# EAGLE board oresat-c3-v2 (EAGLE 9.5.2), part 1 of 2
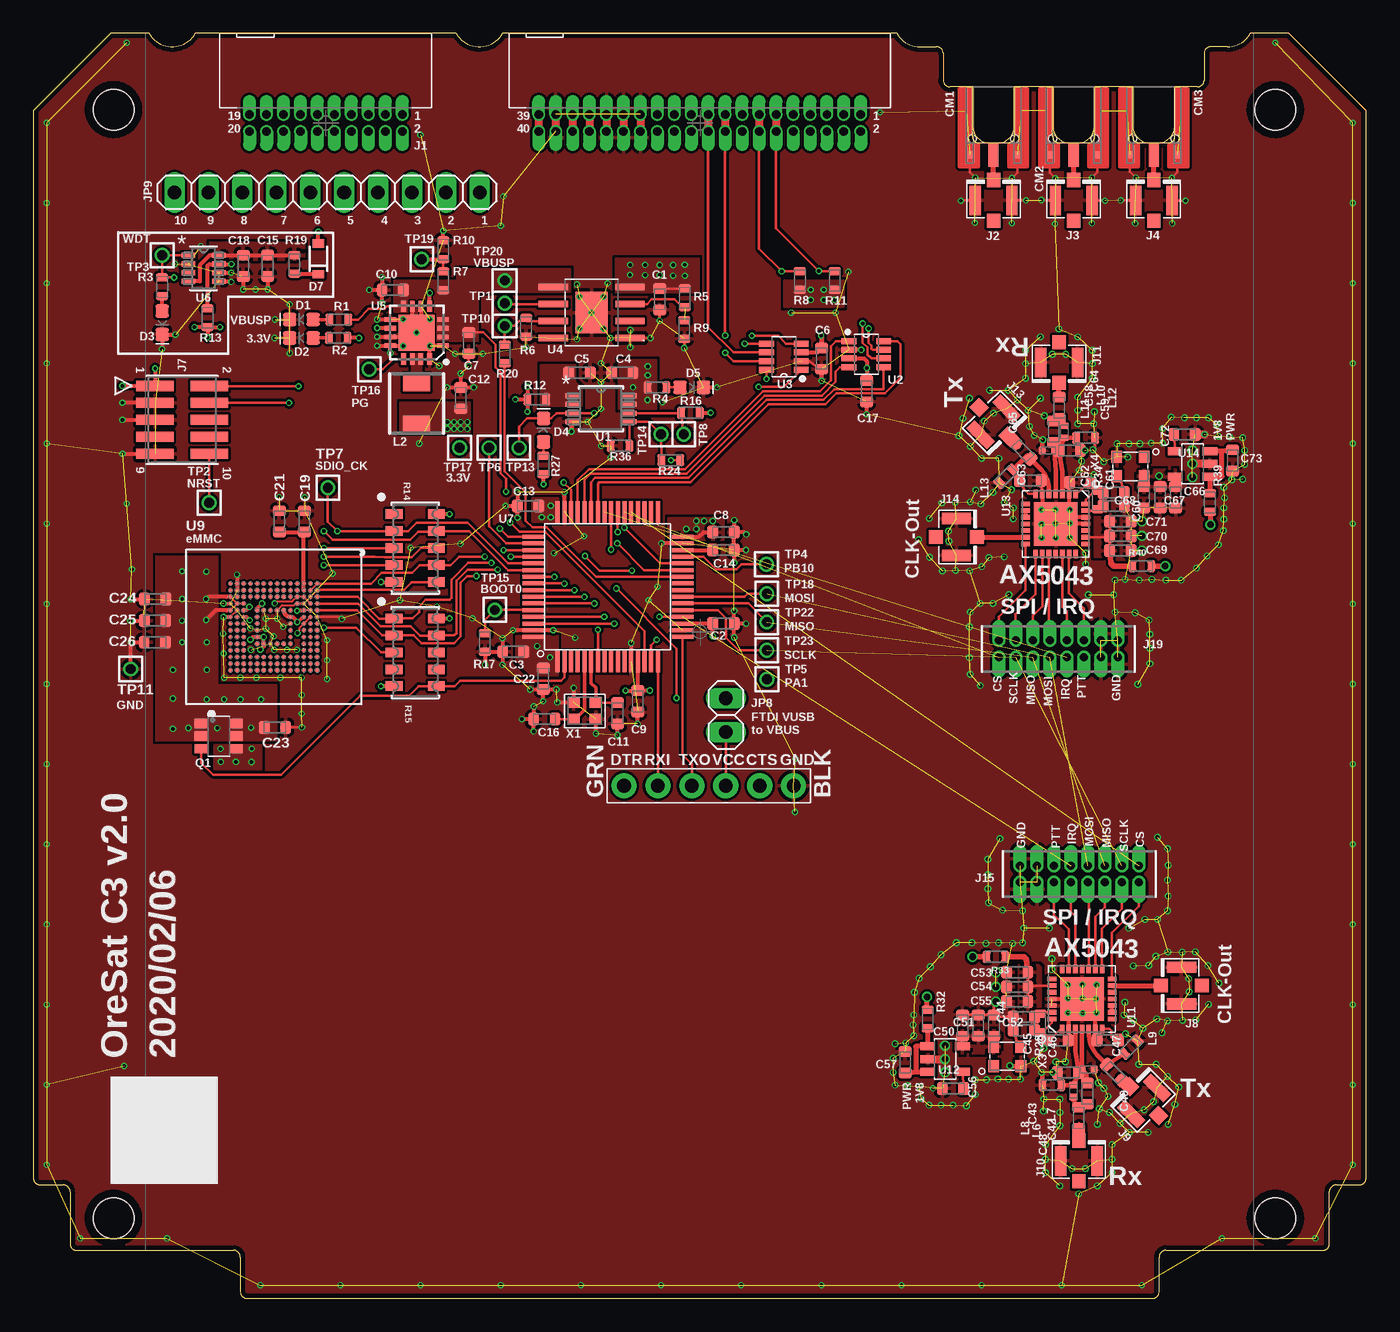
[diagram p0: board, top side]
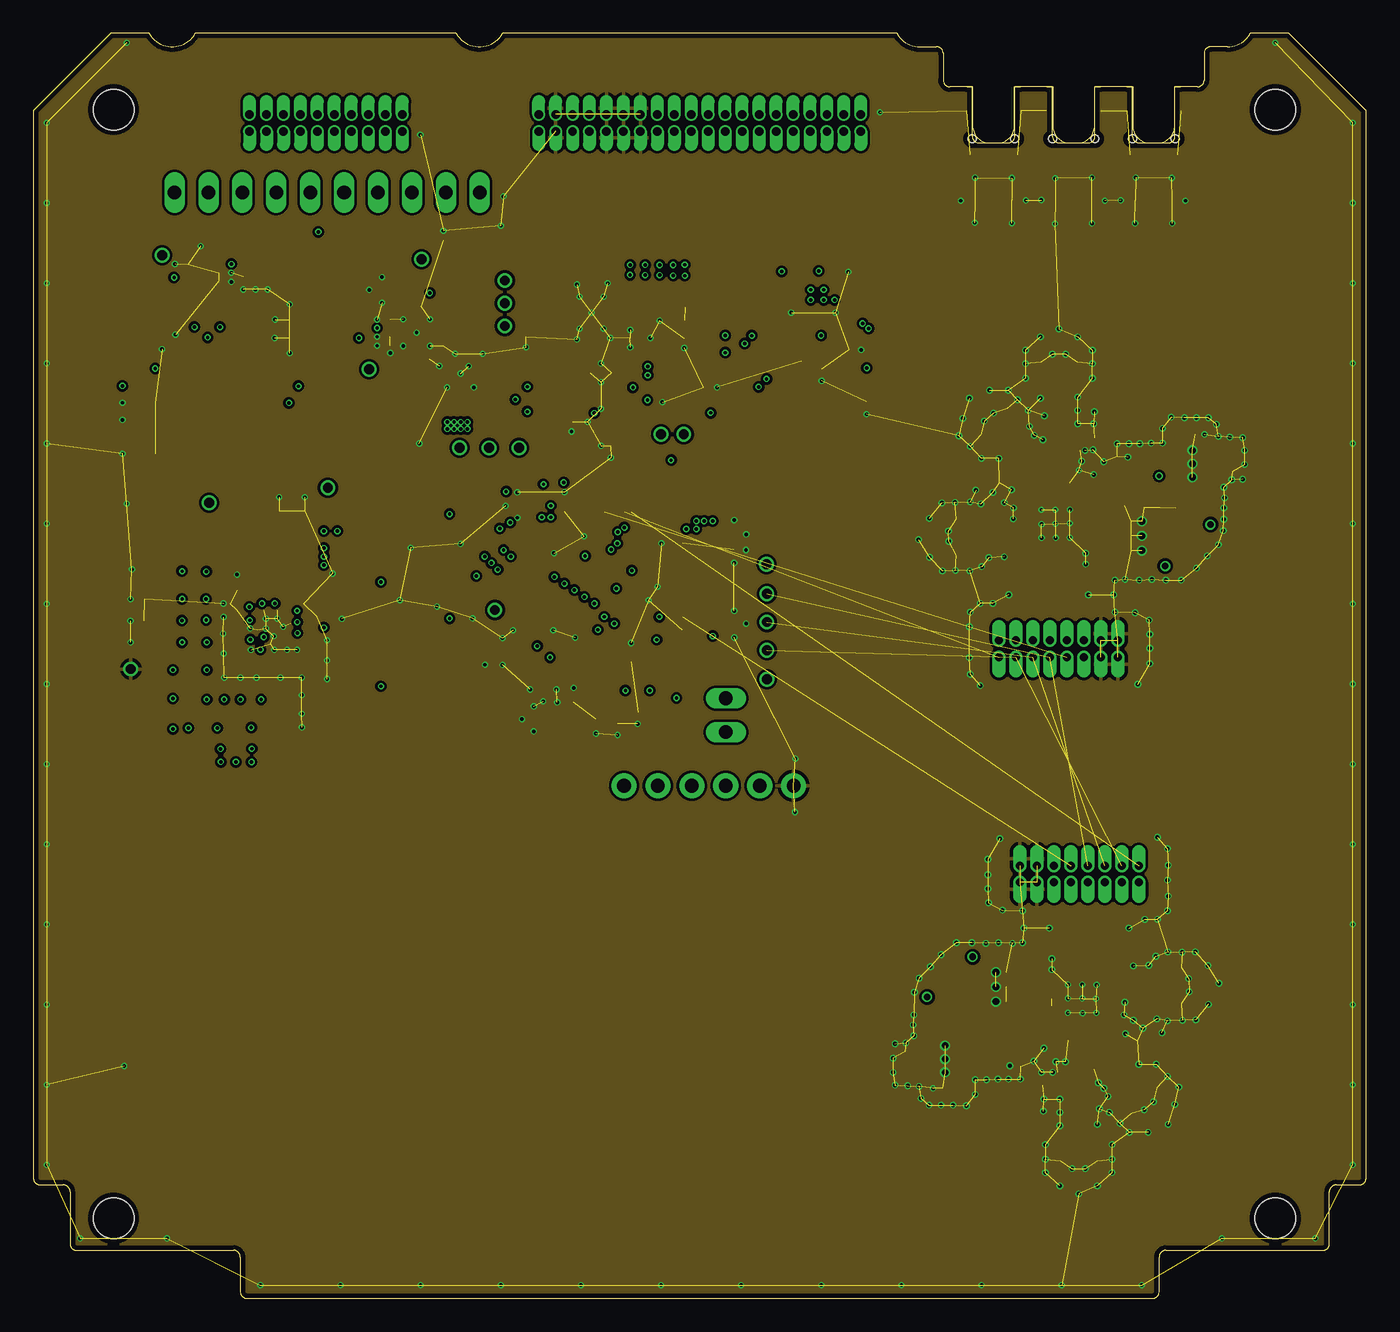
[diagram p1: board, inner layer Route2]
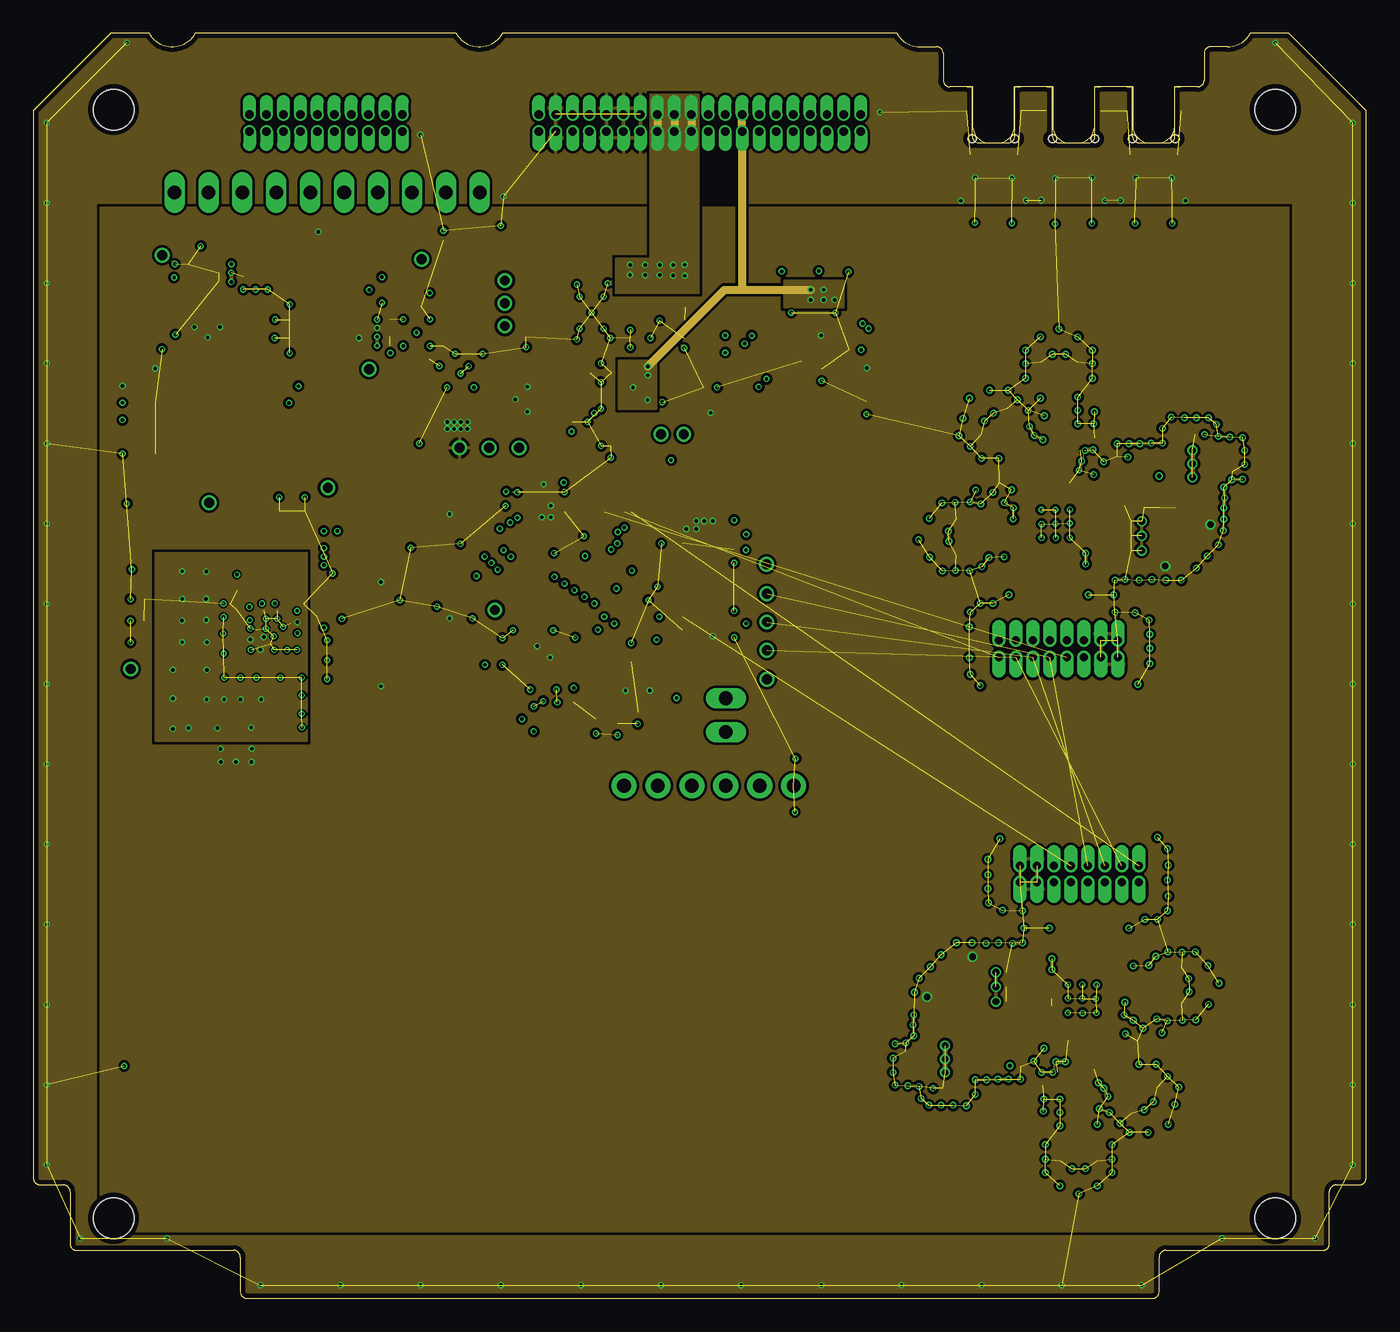
[diagram p2: board, inner layer route]
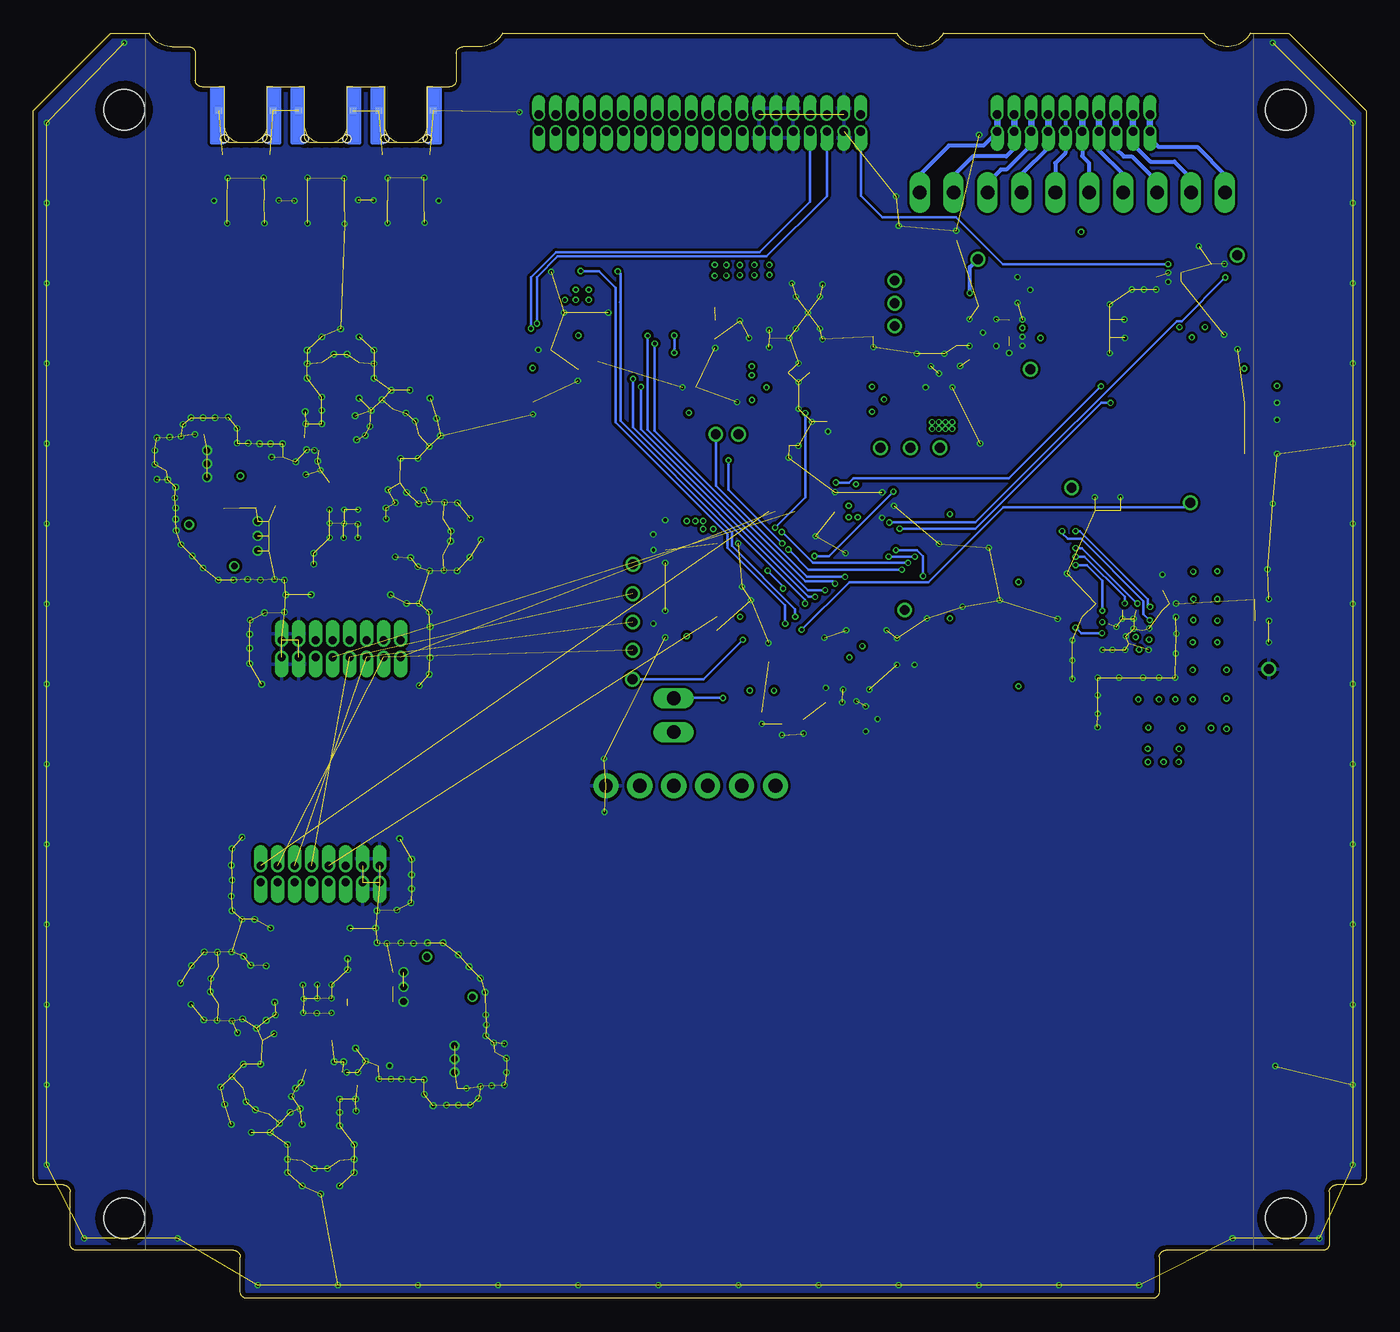
[diagram p3: board, bottom side, seen from below]

Size 99.8 x 94.7 mm. Coordinates in mm from the lower left corner, seen from the top.
Copper layers (1*2*15*16): Top 0.035559375mm / dielectric 0.17018125mm / Route2 0.01778125mm / dielectric 47mil / route 0.01778125mm / dielectric 0.17018125mm / Bottom 0.035559375mm
Design rules "oshpark-4layer *": minimum track width 5mil, minimum drill 10mil, track to track 5mil, track to pad 5mil, pad to pad 5mil, via to via 5mil, smd to smd 5mil, copper to edge 15mil, drill to drill 6mil, minimum pad ring 4mil, minimum via ring 4mil, stop-mask expansion 2.5mil, vias tented up to drill 10mil, thermal gap 10mil
Net classes: 1 RF1: clearance 0.8 mm; 2 RF2: clearance 0.4 mm

## Footprints (pad centres in the part's own frame; a part is rotated, then mirrored left to right if it is on the bottom)
.0603-B-NOSILK = smd 0.8 x 0.95: 1 -0.8,0; 2 0.8,0
J-MOLEX-SMPM-073300-003X = smd 0.508 x 0.508: P$1 -1.778,-5.08; P$2 1.778,-5.08 | smd 0.508 x 0.508 bottom: P$3 -2.032,-1.778; P$4 2.032,-1.778 | smd 0.762 x 1.778: RF 0,-5.08 | hole 0.61: 1.587,-3.886; -1.587,-3.886
LED-0603 = smd 1 x 1: A -0.877,0; C 0.877,0
SOD-323 = smd 0.63 x 0.83: 1 -1.15,0; 2 1.15,0
STAND-OFF-TIGHT = hole 3.048: 0,0
J-SAMTEC-TFM-110-X1-XXX-D-RA = drill 0.635 pad 0.965 offset: 1 5.715,0.635; 2 5.715,-0.635; 3 4.445,0.635; 4 4.445,-0.635; 5 3.175,0.635; 6 3.175,-0.635; 7 1.905,0.635; 8 1.905,-0.635; 9 0.635,0.635; 10 0.635,-0.635; 11 -0.635,0.635; 12 -0.635,-0.635; 13 -1.905,0.635; 14 -1.905,-0.635; 15 -3.175,0.635; 16 -3.175,-0.635; 17 -4.445,0.635; 18 -4.445,-0.635; 19 -5.715,0.635; 20 -5.715,-0.635
U.FL = smd 2.2 x 0.85: 1 0,1.375; 2 0,-1.375 | smd 1.05 x 1: FEED 1.525,0; NC -1.525,0
J-SAMTEC-TFM-120-X1-XXX-D-RA = drill 0.635 pad 0.965 offset: 1 12.065,0.635; 2 12.065,-0.635; 3 10.795,0.635; 4 10.795,-0.635; 5 9.525,0.635; 6 9.525,-0.635; 7 8.255,0.635; 8 8.255,-0.635; 9 6.985,0.635; 10 6.985,-0.635; 11 5.715,0.635; 12 5.715,-0.635; 13 4.445,0.635; 14 4.445,-0.635; 15 3.175,0.635; 16 3.175,-0.635; 17 1.905,0.635; 18 1.905,-0.635; 19 0.635,0.635; 20 0.635,-0.635; 21 -0.635,0.635; 22 -0.635,-0.635; 23 -1.905,0.635; 24 -1.905,-0.635; 25 -3.175,0.635; 26 -3.175,-0.635; 27 -4.445,0.635; 28 -4.445,-0.635; 29 -5.715,0.635; 30 -5.715,-0.635; 31 -6.985,0.635; 32 -6.985,-0.635; 33 -8.255,0.635; 34 -8.255,-0.635; 35 -9.525,0.635; 36 -9.525,-0.635; 37 -10.795,0.635; 38 -10.795,-0.635; 39 -12.065,0.635; 40 -12.065,-0.635
CON10_2X5_DUK_FTSH = smd 0.762 x 2.794: 1 -2.54,-2.032; 2 -2.54,2.032; 3 -1.27,-2.032; 4 -1.27,2.032; 5 0,-2.032; 6 0,2.032; 7 1.27,-2.032; 8 1.27,2.032; 9 2.54,-2.032; 10 2.54,2.032
2X8X1.27 = drill 0.6 pad 1.016 offset: 1 -4.445,0.635; 2 -4.445,-0.635; 3 -3.175,0.635; 4 -3.175,-0.635; 5 -1.905,0.635; 6 -1.905,-0.635; 7 -0.635,0.635; 8 -0.635,-0.635; 9 0.635,0.635; 10 0.635,-0.635; 11 1.905,0.635; 12 1.905,-0.635; 13 3.175,0.635; 14 3.175,-0.635; 15 4.445,0.635; 16 4.445,-0.635
1X02 = drill 1.016 long: 1 -1.27,0; 2 1.27,0
1X10 = drill 1.016 long: 1 -11.43,0; 2 -8.89,0; 3 -6.35,0; 4 -3.81,0; 5 -1.27,0; 6 1.27,0; 7 3.81,0; 8 6.35,0; 9 8.89,0; 10 11.43,0
ECS-MPI4040 = smd 2 x 1.3: 1 0,1.575; 2 0,-1.575
.0402-C-NOSILK = smd 0.5 x 0.6: 1 -0.45,0; 2 0.45,0
.0603-C-NOSILK = smd 0.6 x 0.9: 1 -0.7,0; 2 0.7,0
SOT23-6 = smd 0.7 x 1: 1 -0.95,-1.3; 2 0,-1.3; 3 0.95,-1.3; 4 0.95,1.3; 5 0,1.3; 6 -0.95,1.3
ARRAY_EXBA-M = smd 1.27 x 0.711: 1 -1.575,2.54; 2 -1.575,1.27; 3 -1.575,0; 4 -1.575,-1.27; 5 -1.575,-2.54; 6 1.575,-2.54; 7 1.575,-1.27; 8 1.575,0; 9 1.575,1.27; 10 1.575,2.54
2MM-TEST-POINT = drill 0.737: 1 0,0
21-0036K-L = smd 1.06 x 0.376: 1 -2.134,0.975; 2 -2.134,0.325; 3 -2.134,-0.325; 4 -2.134,-0.975; 5 2.134,-0.975; 6 2.134,-0.325; 7 2.134,0.325; 8 2.134,0.975
SOT23-8_TI-DCN = smd 0.45 x 1.1: 1 -0.975,-1.3; 2 -0.325,-1.3; 3 0.325,-1.3; 4 0.975,-1.3; 5 0.975,1.3; 6 0.325,1.3; 7 -0.325,1.3; 8 -0.975,1.3
SO-POWERPAD-8 = smd 0.5 x 2.2: 1 -1.905,-2.875; 2 -0.635,-2.875; 3 0.635,-2.875; 4 1.905,-2.875; 5 1.905,2.875; 6 0.635,2.875; 7 -0.635,2.875; 8 -1.905,2.875 | smd 3.1 x 2.4: THERMAL 0,0
S-PVQFN-16 = smd 0.85 x 0.35: 1 -1.975,0.975; 2 -1.975,0.325; 3 -1.975,-0.325; 4 -1.975,-0.975; 9 1.975,-0.975; 10 1.975,-0.325; 11 1.975,0.325; 12 1.975,0.975 | smd 0.35 x 0.85: 5 -0.975,-1.975; 6 -0.325,-1.975; 7 0.325,-1.975; 8 0.975,-1.975; 13 0.975,1.975; 14 0.325,1.975; 15 -0.325,1.975; 16 -0.975,1.975 | smd 2.7 x 2.7: PAD 0,0
21-0078H-L = smd 1.016 x 0.381: 1 -1.143,0.975; 2 -1.143,0.325; 3 -1.143,-0.325; 4 -1.143,-0.975; 5 1.143,-0.975; 6 1.143,-0.325; 7 1.143,0.325; 8 1.143,0.975
QFP-10X10-64 = smd 1.6 x 0.3: 1 -5.6,3.75; 2 -5.6,3.25; 3 -5.6,2.75; 4 -5.6,2.25; 5 -5.6,1.75; 6 -5.6,1.25; 7 -5.6,0.75; 8 -5.6,0.25; 9 -5.6,-0.25; 10 -5.6,-0.75; 11 -5.6,-1.25; 12 -5.6,-1.75; 13 -5.6,-2.25; 14 -5.6,-2.75; 15 -5.6,-3.25; 16 -5.6,-3.75; 33 5.6,-3.75; 34 5.6,-3.25; 35 5.6,-2.75; 36 5.6,-2.25; 37 5.6,-1.75; 38 5.6,-1.25; 39 5.6,-0.75; 40 5.6,-0.25; 41 5.6,0.25; 42 5.6,0.75; 43 5.6,1.25; 44 5.6,1.75; 45 5.6,2.25; 46 5.6,2.75; 47 5.6,3.25; 48 5.6,3.75 | smd 0.3 x 1.6: 17 -3.75,-5.6; 18 -3.25,-5.6; 19 -2.75,-5.6; 20 -2.25,-5.6; 21 -1.75,-5.6; 22 -1.25,-5.6; 23 -0.75,-5.6; 24 -0.25,-5.6; 25 0.25,-5.6; 26 0.75,-5.6; 27 1.25,-5.6; 28 1.75,-5.6; 29 2.25,-5.6; 30 2.75,-5.6; 31 3.25,-5.6; 32 3.75,-5.6; 49 3.75,5.6; 50 3.25,5.6; 51 2.75,5.6; 52 2.25,5.6; 53 1.75,5.6; 54 1.25,5.6; 55 0.75,5.6; 56 0.25,5.6; 57 -0.25,5.6; 58 -0.75,5.6; 59 -1.25,5.6; 60 -1.75,5.6; 61 -2.25,5.6; 62 -2.75,5.6; 63 -3.25,5.6; 64 -3.75,5.6
BGA-153(11.5X13)(EMMC-BA) = smd 0.28 x 0.28: A1 -3.25,3.25; A2 -2.75,3.25; A3 -2.25,3.25; A4 -1.75,3.25; A5 -1.25,3.25; A6 -0.75,3.25; A7 -0.25,3.25; A8 0.25,3.25; A9 0.75,3.25; A10 1.25,3.25; A11 1.75,3.25; A12 2.25,3.25; A13 2.75,3.25; A14 3.25,3.25; B1 -3.25,2.75; B2 -2.75,2.75; B3 -2.25,2.75; B4 -1.75,2.75; B5 -1.25,2.75; B6 -0.75,2.75; B7 -0.25,2.75; B8 0.25,2.75; B9 0.75,2.75; B10 1.25,2.75; B11 1.75,2.75; B12 2.25,2.75; B13 2.75,2.75; B14 3.25,2.75; C1 -3.25,2.25; C2 -2.75,2.25; C3 -2.25,2.25; C4 -1.75,2.25; C5 -1.25,2.25; C6 -0.75,2.25; C7 -0.25,2.25; C8 0.25,2.25; C9 0.75,2.25; C10 1.25,2.25; C11 1.75,2.25; C12 2.25,2.25; C13 2.75,2.25; C14 3.25,2.25; D1 -3.25,1.75; D2 -2.75,1.75; D3 -2.25,1.75; D4 -1.75,1.75; D12 2.25,1.75; D13 2.75,1.75; D14 3.25,1.75; E1 -3.25,1.25; E2 -2.75,1.25; E3 -2.25,1.25; E5 -1.25,1.25; E6 -0.75,1.25; E7 -0.25,1.25; E8 0.25,1.25; E9 0.75,1.25; E10 1.25,1.25; E12 2.25,1.25; E13 2.75,1.25; E14 3.25,1.25; F1 -3.25,0.75; F2 -2.75,0.75; F3 -2.25,0.75; F5 -1.25,0.75; F10 1.25,0.75; F12 2.25,0.75; F13 2.75,0.75; F14 3.25,0.75; G1 -3.25,0.25; G2 -2.75,0.25; G3 -2.25,0.25; G5 -1.25,0.25; G10 1.25,0.25; G12 2.25,0.25; G13 2.75,0.25; G14 3.25,0.25; H1 -3.25,-0.25; H2 -2.75,-0.25; H3 -2.25,-0.25; H5 -1.25,-0.25; H10 1.25,-0.25; H12 2.25,-0.25; H13 2.75,-0.25; H14 3.25,-0.25; J1 -3.25,-0.75; J2 -2.75,-0.75; J3 -2.25,-0.75; J5 -1.25,-0.75; J10 1.25,-0.75; J12 2.25,-0.75; J13 2.75,-0.75; J14 3.25,-0.75; K1 -3.25,-1.25; K2 -2.75,-1.25; K3 -2.25,-1.25; K5 -1.25,-1.25; K6 -0.75,-1.25; K7 -0.25,-1.25; K8 0.25,-1.25; K9 0.75,-1.25; K10 1.25,-1.25; K12 2.25,-1.25; K13 2.75,-1.25; K14 3.25,-1.25; L1 -3.25,-1.75; L2 -2.75,-1.75; L3 -2.25,-1.75; L12 2.25,-1.75; L13 2.75,-1.75; L14 3.25,-1.75; M1 -3.25,-2.25; M2 -2.75,-2.25; M3 -2.25,-2.25; M4 -1.75,-2.25; M5 -1.25,-2.25; M6 -0.75,-2.25; M7 -0.25,-2.25; M8 0.25,-2.25; M9 0.75,-2.25; M10 1.25,-2.25; M11 1.75,-2.25; M12 2.25,-2.25; M13 2.75,-2.25; M14 3.25,-2.25; N1 -3.25,-2.75; N2 -2.75,-2.75; N3 -2.25,-2.75; N4 -1.75,-2.75; N5 -1.25,-2.75; N6 -0.75,-2.75; N7 -0.25,-2.75; N8 0.25,-2.75; N9 0.75,-2.75; N10 1.25,-2.75; N11 1.75,-2.75; N12 2.25,-2.75; N13 2.75,-2.75; N14 3.25,-2.75; P1 -3.25,-3.25; P2 -2.75,-3.25; P3 -2.25,-3.25; P4 -1.75,-3.25; P5 -1.25,-3.25; P6 -0.75,-3.25; P7 -0.25,-3.25; P8 0.25,-3.25; P9 0.75,-3.25; P10 1.25,-3.25; P11 1.75,-3.25; P12 2.25,-3.25; P13 2.75,-3.25; P14 3.25,-3.25
QFN28-5X5-WITH-CENTER-PAD = smd 0.65 x 0.35: 1 -2.25,1.5; 2 -2.25,1; 3 -2.25,0.5; 4 -2.25,0; 5 -2.25,-0.5; 6 -2.25,-1; 7 -2.25,-1.5; 15 2.25,-1.5; 16 2.25,-1; 17 2.25,-0.5; 18 2.25,0; 19 2.25,0.5; 20 2.25,1; 21 2.25,1.5 | smd 0.35 x 0.65: 8 -1.5,-2.25; 9 -1,-2.25; 10 -0.5,-2.25; 11 0,-2.25; 12 0.5,-2.25; 13 1,-2.25; 14 1.5,-2.25; 22 1.5,2.25; 23 1,2.25; 24 0.5,2.25; 25 0,2.25; 26 -0.5,2.25; 27 -1,2.25; 28 -1.5,2.25 | smd 3.25 x 3.25: PAD 0,0
SOT-23 = smd 1.1 x 0.6: 1 -1.3,0.95; 2 -1.3,0; 3 -1.3,-0.95; 4 1.3,-0.95; 5 1.3,0.95
6_PIN_SERIAL_TARGET_SIDE_W_SILK = drill 1.016 pad 1.88: P$1 -6.35,0; P$2 -3.81,0; P$3 -1.27,0; P$4 1.27,0; P$5 3.81,0; P$6 6.35,0
CRYSTAL_2.5X2 = smd 0.9 x 0.8: 1 -0.825,-0.625; 2 0.825,-0.625; 3 0.825,0.625; 4 -0.825,0.625
2.5X2.0 = smd 0.8 x 0.9: 1 -1.025,-0.725; 2 1.025,-0.725; 3 1.025,0.725; 4 -1.025,0.725

## Placement (x,y rotation side)
C1  1uF  [.0603-B-NOSILK]  46.9,74.8 270 top
C2  0.1uf  [.0603-B-NOSILK]  51.68,50.52 180 top
C3  0.1uf  [.0603-B-NOSILK]  35.93,48.41 0 top
C4  1uF  [.0603-B-NOSILK]  44.1,69.3 180 top
C5  1uF  [.0603-B-NOSILK]  40.9,69.3 0 top
C6  0.1uf  [.0603-B-NOSILK]  59.03,70.36 90 top
C7  10uF  [.0603-B-NOSILK]  32.6,71.52 270 top
C8  0.1uf  [.0603-B-NOSILK]  51.68,57.37 180 top
C9  0.1uf  [.0603-B-NOSILK]  45.26,44.7 90 top
C10  10uF  [.0603-B-NOSILK]  26.91,75.49 180 top
C11  20pF  [.0603-B-NOSILK]  43.74,43.81 270 top
C12  22pF  [.0603-B-NOSILK]  32,67.4 90 top
C13  0.1uf  [.0603-B-NOSILK]  37.04,59.33 0 top
C14  2.2uF  [.0603-B-NOSILK]  51.68,56.03 0 top
C15  0.1uf  [.0603-B-NOSILK]  17.54,77.3 270 top
C16  20pF  [.0603-B-NOSILK]  38.26,43.37 180 top
C17  0.1uf  [.0603-B-NOSILK]  62.4,67.91 90 top
C18  47uF  [.0603-B-NOSILK]  15.72,77.29 270 top
C19  2.2uF  [.0603-B-NOSILK]  20.3,58.17 90 top
C21  0.1uf  [.0603-B-NOSILK]  18.42,58.17 90 top
C22  0.1uf  [.0603-B-NOSILK]  38.19,46.39 90 top
C23  1uF  [.0603-B-NOSILK]  18.09,42.75 0 top
C24  1uF  [.0603-B-NOSILK]  9.12,52.36 180 top
C25  1uF  [.0603-B-NOSILK]  9.11,50.74 180 top
C26  10uF  [.0603-B-NOSILK]  9.1,49.12 180 top
C42  8.2pF  [.0603-B-NOSILK]  78.92,15.34 90 top
C43  8.2pF  [.0603-B-NOSILK]  77.47,16.93 0 top
C44  1000pF  [.0603-B-NOSILK]  74.17,21.07 180 top
C45  1000pF  [.0603-B-NOSILK]  74.17,20.07 180 top
C46  82pF  [.0603-B-NOSILK]  76.67,19.32 0 top
C47  82pF  [.0603-B-NOSILK]  80.45,19.36 0 top
C48  22pF  [.0603-B-NOSILK]  78.27,13.52 90 top
C49  22pF  [.0603-B-NOSILK]  80.94,16.91 135 top
C50  0.022uF  [.0603-B-NOSILK]  69.58,20.43 90 top
C51  0.022uF  [.0603-B-NOSILK]  70.75,20.43 90 top
C52  4.7uF  [.0603-B-NOSILK]  71.92,20.43 90 top
C53  0.022uF  [.0603-B-NOSILK]  73.67,24.43 180 top
C54  0.022uF  [.0603-B-NOSILK]  73.67,23.32 180 top
C55  4.7uF  [.0603-B-NOSILK]  73.67,22.23 180 top
C56  10n  [.0603-B-NOSILK]  68.88,15.72 180 top
C57  1uF  [.0603-B-NOSILK]  65.28,17.68 90 top
C58  8.2pF  [.0603-B-NOSILK]  76.4,64.88 270 top
C59  8.2pF  [.0603-B-NOSILK]  77.6,63.48 180 top
C60  1000pF  [.0603-B-NOSILK]  80.9,59.33 0 top
C61  1000pF  [.0603-B-NOSILK]  80.9,60.33 0 top
C62  82pF  [.0603-B-NOSILK]  78.4,61.08 180 top
C63  82pF  [.0603-B-NOSILK]  74.65,61.23 180 top
C64  22pF  [.0603-B-NOSILK]  76.8,66.68 270 top
C65  22pF  [.0603-B-NOSILK]  74.1,63.44 315 top
C66  0.022uF  [.0603-B-NOSILK]  85.54,59.97 270 top
C67  0.1uf  [.0603-B-NOSILK]  84.36,59.98 270 top
C68  4.7uF  [.0603-B-NOSILK]  83.15,59.98 270 top
C69  0.022uF  [.0603-B-NOSILK]  81.4,55.98 0 top
C70  0.1uf  [.0603-B-NOSILK]  81.4,57.08 0 top
C71  4.7uF  [.0603-B-NOSILK]  81.4,58.18 0 top
C72  10n  [.0603-B-NOSILK]  86.2,64.68 0 top
C73  1uF  [.0603-B-NOSILK]  89.8,62.73 270 top
CM1  J-MOLEX-SMPM-73300-003X  [J-MOLEX-SMPM-073300-003X]  71.9,90.7 0 top
CM2  J-MOLEX-SMPM-73300-003X  [J-MOLEX-SMPM-073300-003X]  77.9,90.7 0 top
CM3  J-MOLEX-SMPM-73300-003X  [J-MOLEX-SMPM-073300-003X]  83.9,90.7 0 top
D1  GREEN  [LED-0603]  20.07,73.28 180 top
D2  GREEN  [LED-0603]  20.07,71.9 180 top
D3  GREEN  [LED-0603]  9.65,73.04 270 top
D4  GREEN  [LED-0603]  38.2,65 90 top
D5  GREEN  [LED-0603]  49.3,68.2 0 top
D7  1N4148  [SOD-323]  21.34,77.82 90 top
H1  STAND-OFFTIGHT  [STAND-OFF-TIGHT]  93,6 0 top
H2  STAND-OFFTIGHT  [STAND-OFF-TIGHT]  93,89 0 top
H3  STAND-OFFTIGHT  [STAND-OFF-TIGHT]  6,89 0 top
H4  STAND-OFFTIGHT  [STAND-OFF-TIGHT]  6,6 0 top
J1  J-SAMTEC-TFM-110-X1-XXX-D-RA  [J-SAMTEC-TFM-110-X1-XXX-D-RA]  21.9,87.99 0 top
J2  U.FL  [U.FL]  71.9,82.2 90 top
J3  U.FL  [U.FL]  77.9,82.2 90 top
J4  U.FL  [U.FL]  83.9,82.2 90 top
J6  J-SAMTEC-TFM-120-X1-XXX-D-RA  [J-SAMTEC-TFM-120-X1-XXX-D-RA]  49.9,87.99 0 top
J7  FTSH-105-XX-X-DV-K  [CON10_2X5_DUK_FTSH]  11.14,65.77 270 top
J8  U.FL  [U.FL]  85.97,23.42 180 top
J9  U.FL  [U.FL]  83.17,14.79 135 top
J10  U.FL  [U.FL]  78.29,10.3 90 top
J11  U.FL  [U.FL]  76.81,70.07 270 top
J13  U.FL  [U.FL]  71.91,65.63 315 top
J14  U.FL  [U.FL]  69.12,57 0 top
J15  HARWIN-2X8X1.27  [2X8X1.27]  78.33,31.77 180 top
J19  HARWIN-2X8X1.27  [2X8X1.27]  76.75,48.63 0 top
JP8  [1X02]  51.86,43.66 270 top
JP9  [1X10]  22,82.8 180 top
L2  6.8u  [ECS-MPI4040]  28.7,67 0 top
L6  43n  [.0402-C-NOSILK]  77.88,15.53 90 top
L7  43n  [.0402-C-NOSILK]  78.97,17.14 180 top
L8  91n  [.0603-C-NOSILK]  76.28,15.97 180 top
L9  91n  [.0603-C-NOSILK]  82.19,18.82 225 top
L10  43n  [.0402-C-NOSILK]  77.2,64.88 270 top
L11  43n  [.0402-C-NOSILK]  76,63.48 0 top
L12  91n  [.0603-C-NOSILK]  78.8,64.43 0 top
L13  91n  [.0603-C-NOSILK]  72.85,61.54 45 top
Q1  MOSFET-PCH-SOT23-6  [SOT23-6]  13.88,42.1 270 top
R1  2.7k  [.0603-C-NOSILK]  22.87,73.28 0 top
R2  2.7k  [.0603-C-NOSILK]  22.83,71.9 0 top
R3  2.7k  [.0603-C-NOSILK]  9.64,75.73 90 top
R4  2.7k  [.0603-C-NOSILK]  46.7,68.2 180 top
R5  31.6k  [.0603-C-NOSILK]  48.78,74.91 89.8 top
R6  3.1k  [.0603-C-NOSILK]  36.9,72.7 90 top
R7  10k  [.0603-C-NOSILK]  30.69,76.18 270 top
R8  4.7k  [.0603-C-NOSILK]  57.4,76.2 90 top
R9  10k  [.0603-C-NOSILK]  48.75,72.54 90 top
R10  NP  [.0603-C-NOSILK]  30.69,78.5 270 top
R11  4.7k  [.0603-C-NOSILK]  60,76.2 90 top
R12  0  [.0603-C-NOSILK]  37.7,67.3 180 top
R13  4.7k  [.0603-C-NOSILK]  13.05,73.41 90 top
R14  10k  [ARRAY_EXBA-M]  28.6,56.17 0 top
R15  10k  [ARRAY_EXBA-M]  28.6,48.37 0 top
R16  10k  [.0603-C-NOSILK]  49.2,66.3 0 top
R17  10k  [.0603-C-NOSILK]  33.81,49.11 90 top
R19  10  [.0603-C-NOSILK]  19.55,77.41 270 top
R20  10k  [.0603-C-NOSILK]  35.3,70.7 270 top
R24  10k  [.0603-C-NOSILK]  47.73,62.75 0 top
R27  10k  [.0603-C-NOSILK]  38.2,62.4 270 top
R28  150  [.0603-C-NOSILK]  75.38,20.62 270 top
R32  0  [.0603-C-NOSILK]  66.97,20.91 270 top
R33  0  [.0603-C-NOSILK]  72.08,25.57 180 top
R34  150  [.0603-C-NOSILK]  79.7,59.78 90 top
R36  23.7k  [.0603-C-NOSILK]  43.93,63.83 0 top
R39  0  [.0603-C-NOSILK]  88.1,59.58 90 top
R40  0  [.0603-C-NOSILK]  83,54.83 0 top
TP1  TEST-POINT  [2MM-TEST-POINT]  35.3,74.5 90 top
TP2  TEST-POINT  [2MM-TEST-POINT]  13.17,59.57 0 top
TP3  TEST-POINT  [2MM-TEST-POINT]  9.64,78.09 0 top
TP4  TEST-POINT  [2MM-TEST-POINT]  54.9,54.97 180 top
TP5  TEST-POINT  [2MM-TEST-POINT]  54.94,46.36 180 top
TP6  TEST-POINT  [2MM-TEST-POINT]  34.13,63.67 0 top
TP7  TEST-POINT  [2MM-TEST-POINT]  22.05,60.68 0 top
TP8  TEST-POINT  [2MM-TEST-POINT]  48.7,64.7 0 top
TP10  TEST-POINT  [2MM-TEST-POINT]  35.3,72.8 90 top
TP11  TEST-POINT  [2MM-TEST-POINT]  7.29,47.12 0 top
TP13  TEST-POINT  [2MM-TEST-POINT]  36.36,63.67 180 top
TP14  TEST-POINT  [2MM-TEST-POINT]  47,64.7 0 top
TP15  TEST-POINT  [2MM-TEST-POINT]  34.56,51.54 180 top
TP16  TEST-POINT  [2MM-TEST-POINT]  25.15,69.55 180 top
TP17  TEST-POINT  [2MM-TEST-POINT]  31.91,63.68 180 top
TP18  TEST-POINT  [2MM-TEST-POINT]  54.92,52.74 180 top
TP19  TEST-POINT  [2MM-TEST-POINT]  29.08,77.8 180 top
TP20  TEST-POINT  [2MM-TEST-POINT]  35.3,76.2 90 top
TP22  TEST-POINT  [2MM-TEST-POINT]  54.92,50.63 0 top
TP23  TEST-POINT  [2MM-TEST-POINT]  54.92,48.52 180 top
U1  MAX892LEUA+T21-0036K-L  [21-0036K-L]  42.5,66.6 0 top
U2  TCAN330  [SOT23-8_TI-DCN]  62.37,70.69 270 top
U3  TCAN330  [SOT23-8_TI-DCN]  56.2,70.5 90 top
U4  TPS259621 - eFuse  [SO-POWERPAD-8]  41.8,73.8 90 top
U5  TPS62111RSA  [S-PVQFN-16]  28.7,72.3 180 top
U6  MAX6374KA-T21-0078H-L  [21-0078H-L]  12.74,77.11 0 top
U7  STM32F446RE  [QFP-10X10-64]  43.02,53.27 90 top
U9  SFEM016GB1EM1TO-A-HG-111-STD  [BGA-153(11.5X13)(EMMC-BA)]  18,50.27 270 top
U11  U-ONSEMI-AX5043  [QFN28-5X5-WITH-CENTER-PAD]  78.53,22.43 90 top
U12  LP2985XX-N  [SOT-23]  68.28,17.93 0 top
U13  U-ONSEMI-AX5043  [QFN28-5X5-WITH-CENTER-PAD]  76.55,57.98 270 top
U14  LP2985XX-N  [SOT-23]  86.8,62.48 180 top
U$1  ORESAT-CARD-V1.1-3XRF  [ORESAT-CARD-V1.1-3XRF]  0,0 0 top
U$2  C3_FTDI_CONN  [6_PIN_SERIAL_TARGET_SIDE_W_SILK]  50.58,38.38 0 top
X1  16MHZ-2.5x2mm  [CRYSTAL_2.5X2]  41.29,43.99 0 top
X3  TAITIEN-TY  [2.5X2.0]  72.92,18.12 0 top
X4  TAITIEN-TY  [2.5X2.0]  82.15,62.28 180 top

## Library data of the parts
C1 C4 C5 C23-C25 = C3_SamacSys_Parts; DESCRIPTION: WALSIN - 0603X105K100CT - CAPACITOR, MLCC, X5R, 1UF, 10V, 0603; DIS: Digi-Key; DPN: 1276-1001-1-ND; HEIGHT: 1mm; MANUFACTURER_NAME: Walsin Technology Corporation; MANUFACTURER_PART_NUMBER: 0603X105K100CT; MFR: Samsung; MOUSER_PART_NUMBER: 791-0603X105K100CT; MOUSER_PRICE-STOCK: https://www.mouser.com/Search/Refine.aspx?Keyword=791-0603X105K100CT; MPN: CL05B104KO5NNNC
C2 C3 C6 C8 C9 C13 C17 C21 C22 = C3_SamacSys_Parts; DESCRIPTION: Multilayer Ceramic Capacitors MLCC - SMD/SMT 10V .1uF X5R 0603 10%; DIS: Digi-Key; DPN: 1276-1001-1-ND; HEIGHT: 0.9mm; MANUFACTURER_NAME: AVX; MANUFACTURER_PART_NUMBER: 0603ZD104KAT2A; MFR: Samsung; MOUSER_PART_NUMBER: 581-0603ZD104KAT2A; MOUSER_PRICE-STOCK: https://www.mouser.com/Search/Refine.aspx?Keyword=581-0603ZD104KAT2A; MPN: CL05B104KO5NNNC
C7 = C3_SamacSys_Parts; DESCRIPTION: Multilayer Ceramic Capacitors MLCC - SMD/SMT 10V 10uF X5R 0603 10%TOL; HEIGHT: 0.9mm; MANUFACTURER_NAME: AVX; MANUFACTURER_PART_NUMBER: 0603ZD106KAT2A; MOUSER_PART_NUMBER: 581-0603ZD106KAT2A; MOUSER_PRICE-STOCK: https://www.mouser.com/Search/Refine.aspx?Keyword=581-0603ZD106KAT2A
C10 C26 = C3_SamacSys_Parts; DESCRIPTION: Multilayer Ceramic Capacitors MLCC - SMD/SMT 10V 10uF X5R 0603 10%TOL; DIS: Digi-Key; DPN: 1276-1001-1-ND; HEIGHT: 0.9mm; MANUFACTURER_NAME: AVX; MANUFACTURER_PART_NUMBER: 0603ZD106KAT2A; MFR: Samsung; MOUSER_PART_NUMBER: 581-0603ZD106KAT2A; MOUSER_PRICE-STOCK: https://www.mouser.com/Search/Refine.aspx?Keyword=581-0603ZD106KAT2A; MPN: CL05B104KO5NNNC
C11 C16 = C3_SamacSys_Parts; DESCRIPTION: Multilayer Ceramic Capacitors MLCC - SMD/SMT 0603 20pF 50volts C0G 5%; DIS: Digi-Key; DPN: 1276-6601-1-ND; HEIGHT: 0.9mm; MANUFACTURER_NAME: Murata Electronics; MANUFACTURER_PART_NUMBER: GRM1885C1H200JA01J; MFR: Samsung; MOUSER_PART_NUMBER: 81-GRM185C1H200JA01J; MOUSER_PRICE-STOCK: https://www.mouser.com/Search/Refine.aspx?Keyword=81-GRM185C1H200JA01J; MPN: CL05C200JB51PNC
C12 C48 C49 C64 C65 = C3_SamacSys_Parts; DESCRIPTION: AVX - 06035A220JAT4A - CERAMIC CAPACITOR 22PF 50V, C0G, 5%, 0603, FULL REEL; HEIGHT: 0.9mm; MANUFACTURER_NAME: AVX; MANUFACTURER_PART_NUMBER: 06035A220JAT4A; MOUSER_PART_NUMBER: 581-06035A220JAT4A; MOUSER_PRICE-STOCK: https://www.mouser.com/Search/Refine.aspx?Keyword=581-06035A220JAT4A
C14 C19 = C3_SamacSys_Parts; DESCRIPTION: Multilayer Ceramic Capacitors MLCC - SMD/SMT 0603 10V 2.2uF X7R 20% T: 0.8mm; DIS: Digi-Key; DPN: 1276-1001-1-ND; HEIGHT: 0.8mm; MANUFACTURER_NAME: TDK; MANUFACTURER_PART_NUMBER: C1608X7R1A225M080AC; MFR: Samsung; MOUSER_PART_NUMBER: 810-C1608X7R1A225M; MOUSER_PRICE-STOCK: https://www.mouser.com/Search/Refine.aspx?Keyword=810-C1608X7R1A225M; MPN: CL05B104KO5NNNC
C15 = C3_SamacSys_Parts; DESCRIPTION: Multilayer Ceramic Capacitors MLCC - SMD/SMT 10V .1uF X5R 0603 10%; DIS: Digi-Key; DPN: 1276-6601-1-ND; HEIGHT: 0.9mm; MANUFACTURER_NAME: AVX; MANUFACTURER_PART_NUMBER: 0603ZD104KAT2A; MFR: Samsung; MOUSER_PART_NUMBER: 581-0603ZD104KAT2A; MOUSER_PRICE-STOCK: https://www.mouser.com/Search/Refine.aspx?Keyword=581-0603ZD104KAT2A; MPN: CL05C200JB51PNC
C18 = C3_SamacSys_Parts; DESCRIPTION: Multilayer Ceramic Capacitors MLCC - SMD/SMT 0603 47uF 6.3volts X5R 20%; DIS: Digi-Key; DPN: 1276-6601-1-ND; HEIGHT: 0.9mm; MANUFACTURER_NAME: Murata Electronics; MANUFACTURER_PART_NUMBER: GRM188R60J476ME15D; MFR: Samsung; MOUSER_PART_NUMBER: 81-GRM188R60J476ME5D; MOUSER_PRICE-STOCK: https://www.mouser.com/Search/Refine.aspx?Keyword=81-GRM188R60J476ME5D; MPN: CL05C200JB51PNC; RS_PART_NUMBER: 1726834P; RS_PRICE-STOCK: http://uk.rs-online.com/web/p/products/1726834P
C42 C43 C58 C59 = C3_SamacSys_Parts; DESCRIPTION: Multilayer Ceramic Chip Capacitor WCAP-CSGP Series 0603 8.2pF NP006038R2D100DFCT10000; HEIGHT: 0.87mm; MANUFACTURER_NAME: Wurth Elektronik; MANUFACTURER_PART_NUMBER: 885012006093; MOUSER_PART_NUMBER: 710-885012006093; MOUSER_PRICE-STOCK: https://www.mouser.com/Search/Refine.aspx?Keyword=710-885012006093
C44 C45 C60 C61 = C3_SamacSys_Parts; DESCRIPTION: Multilayer Ceramic Chip Capacitor WCAP-CSGP Series 0603 1000pF NP00603102J100DFCT10000; HEIGHT: 0.87mm; MANUFACTURER_NAME: Wurth Elektronik; MANUFACTURER_PART_NUMBER: 885012006085; MOUSER_PART_NUMBER: 710-885012006085; MOUSER_PRICE-STOCK: https://www.mouser.com/Search/Refine.aspx?Keyword=710-885012006085
C46 C47 C62 C63 = C3_SamacSys_Parts; DESCRIPTION: Multilayer Ceramic Capacitors MLCC - SMD/SMT 50V 82pF C0G 0603 5% Tol; HEIGHT: 0.9mm; MANUFACTURER_NAME: AVX; MANUFACTURER_PART_NUMBER: 06035A820JAT4A; MOUSER_PART_NUMBER: 581-06035A820JAT4A; MOUSER_PRICE-STOCK: https://www.mouser.com/Search/Refine.aspx?Keyword=581-06035A820JAT4A
C50 C51 C53 C54 C66 C69 = C3_SamacSys_Parts; ALLIED_NUMBER: 70096988; ALLIED_PRICE-STOCK: https://www.alliedelec.com/kemet-c0603c223k5ractu/70096988/; DESCRIPTION: 0603 X7R ceramic capacitor, 50V 22nF Kemet 0603 22nF Ceramic Multilayer Capacitor, 50V dc, 125C, X7R Dielectric, +/-10% SMD; HEIGHT: 0.87mm; MANUFACTURER_NAME: Kemet; MANUFACTURER_PART_NUMBER: C0603C223K5RACTU; MOUSER_PART_NUMBER: 80-C0603C223K5R; MOUSER_PRICE-STOCK: https://www.mouser.com/Search/Refine.aspx?Keyword=80-C0603C223K5R; RS_PART_NUMBER: 2644602P; RS_PRICE-STOCK: http://uk.rs-online.com/web/p/products/2644602P
C52 C55 C68 C71 = C3_SamacSys_Parts; DESCRIPTION: Capacitor MLCC 0603 10V 4.7uF X7S; HEIGHT: 0.8mm; MANUFACTURER_NAME: TDK; MANUFACTURER_PART_NUMBER: C1608X7S1A475K080AC; MOUSER_PART_NUMBER: 810-C1608X7S1A475KAC; MOUSER_PRICE-STOCK: https://www.mouser.com/Search/Refine.aspx?Keyword=810-C1608X7S1A475KAC; RS_PART_NUMBER: 9159230P; RS_PRICE-STOCK: http://uk.rs-online.com/web/p/products/9159230P
C56 C72 = C3_SamacSys_Parts; DESCRIPTION: Multilayer Ceramic Chip Capacitor WCAP-CSST Series 0603 10000pF X7R0603103K050DFCT1S000; HEIGHT: 0.87mm; MANUFACTURER_NAME: Wurth Elektronik; MANUFACTURER_PART_NUMBER: 885382206002; MOUSER_PART_NUMBER: 710-885382206002; MOUSER_PRICE-STOCK: https://www.mouser.com/Search/Refine.aspx?Keyword=710-885382206002; RS_PART_NUMBER: 1855654P; RS_PRICE-STOCK: http://uk.rs-online.com/web/p/products/1855654P
C57 C73 = C3_SamacSys_Parts; DESCRIPTION: WALSIN - 0603X105K100CT - CAPACITOR, MLCC, X5R, 1UF, 10V, 0603; HEIGHT: 1mm; MANUFACTURER_NAME: Walsin Technology Corporation; MANUFACTURER_PART_NUMBER: 0603X105K100CT; MOUSER_PART_NUMBER: 791-0603X105K100CT; MOUSER_PRICE-STOCK: https://www.mouser.com/Search/Refine.aspx?Keyword=791-0603X105K100CT
C67 C70 = C3_SamacSys_Parts; DESCRIPTION: Multilayer Ceramic Capacitors MLCC - SMD/SMT 10V .1uF X5R 0603 10%; HEIGHT: 0.9mm; MANUFACTURER_NAME: AVX; MANUFACTURER_PART_NUMBER: 0603ZD104KAT2A; MOUSER_PART_NUMBER: 581-0603ZD104KAT2A; MOUSER_PRICE-STOCK: https://www.mouser.com/Search/Refine.aspx?Keyword=581-0603ZD104KAT2A
CM1-CM3 = J-Molex-SMPM-73300-003X; MFR: Molex; MPN: 73300-0020
D1 D2 D4 D5 = SparkFun-LED
D3 = SparkFun-LED; PROD_ID: DIO-00821
D7 = SparkFun
H1-H4 = SparkFun-Hardware
J1 = J-Samtec-TFM-110-X1-XXX-D-RA; MFR: Samtec; MPN: TFM-110-01-L-D-RA
J2-J4 J8-J11 J13 J14 = SparkFun-Connectors; PROD_ID: CONN-09193; SF_ID: WRL-09144
J6 = J-Samtec-TFM-120-X1-XXX-D-RA; MFR: Samtec; MPN: TFM-120-01-L-D-RA
J7 = J-Samtec-FTSH-105-XXX-DV-K-ARM-SWD; MFR: Samtec; MPN: FTSH-105-01-F-DV-K
J15 J19 = J-Harwin-M50-3610842R-2X8X1.27_Male 
JP8 JP9 = pinhead
L2 = L-ECS-MPI4040; MFR: ECS; MPN: ECS-MPI4040R4-6R8-R
L6-L13 = oresat-rcl
Q1 = Q-MOSFET-PCH-SOT23-6
R1-R4 = C3_SamacSys_Parts; DESCRIPTION: Thick Film Resistors - SMD 2.7KOHM 1/10WATT 1%; DIS: Digi-Key; DPN: 1276-4275-1-ND; HEIGHT: 0.55mm; MANUFACTURER_NAME: Bourns; MANUFACTURER_PART_NUMBER: CR0603-FX-2701ELF; MFR: Samsung; MOUSER_PART_NUMBER: 652-CR0603-FX2701ELF; MOUSER_PRICE-STOCK: https://www.mouser.com/Search/Refine.aspx?Keyword=652-CR0603-FX2701ELF; MPN: RC1005F6653CS
R5 = C3_SamacSys_Parts; DESCRIPTION: BOURNS - CR0603-FX-3162ELF - RES, 31K6, 1%, 0603, THICK FILM; DIS: Digi-Key; DPN: 1276-4275-1-ND; HEIGHT: 0.55mm; MANUFACTURER_NAME: Bourns; MANUFACTURER_PART_NUMBER: CR0603-FX-3162ELF; MFR: Samsung; MOUSER_PART_NUMBER: 652-CR0603FX-3162ELF; MOUSER_PRICE-STOCK: https://www.mouser.com/Search/Refine.aspx?Keyword=652-CR0603FX-3162ELF; MPN: RC1005F6653CS
R6 = C3_SamacSys_Parts; DESCRIPTION: Thick Film Resistors - SMD 2.7KOHM 1/10WATT 1%; DIS: Digi-Key; DPN: 1276-4275-1-ND; HEIGHT: 0.45mm; MANUFACTURER_NAME: Bourns; MANUFACTURER_PART_NUMBER: CHP0603-FX-3011ELF; MFR: Samsung; MOUSER_PART_NUMBER: 652-CHP0603FX3011ELF; MPN: RC1005F6653CS
R7 R9 R16 R17 R27 = C3_SamacSys_Parts; ALLIED_NUMBER: 70154687; ALLIED_PRICE-STOCK: https://www.alliedelec.com/bourns-cr0603-fx-1002elf/70154687/; DESCRIPTION: SMD 0603 thick film resistor 10K 1% Bourns CR0603-FX Series Thick Film Surface Mount Fixed Resistor 0603 Case 10k +/-1% 0.1W +/-100ppm/C; DIS: Digi-Key; DPN: 1276-4275-1-ND; HEIGHT: 0.55mm; MANUFACTURER_NAME: Bourns; MANUFACTURER_PART_NUMBER: CR0603-FX-1002ELF; MFR: Samsung; MOUSER_PART_NUMBER: 652-CR0603FX-1002ELF; MOUSER_PRICE-STOCK: https://www.mouser.com/Search/Refine.aspx?Keyword=652-CR0603FX-1002ELF; MPN: RC1005F6653CS; RS_PART_NUMBER: 7408805P; RS_PRICE-STOCK: http://uk.rs-online.com/web/p/products/7408805P
R8 R11 R13 = C3_SamacSys_Parts; ALLIED_NUMBER: 70408523; ALLIED_PRICE-STOCK: https://www.alliedelec.com/bourns-cr0603-fx-4701elf/70408523/; DESCRIPTION: SMD 0603 thick film resistor 4K7 1% Bourns CR0603-FX Series Thick Film Surface Mount Fixed Resistor 0603 Case 4.7k +/-1% 0.1W +/-100ppm/C; HEIGHT: 0.55mm; MANUFACTURER_NAME: Bourns; MANUFACTURER_PART_NUMBER: CR0603-FX-4701ELF; MOUSER_PART_NUMBER: 652-CR0603FX-4701ELF; MOUSER_PRICE-STOCK: https://www.mouser.com/Search/Refine.aspx?Keyword=652-CR0603FX-4701ELF; RS_PART_NUMBER: 7408877P; RS_PRICE-STOCK: http://uk.rs-online.com/web/p/products/7408877P
R10 R12 = C3_SamacSys_Parts; DESCRIPTION: Thick Film Resistors - SMD; DIS: Digi-Key; DPN: 1276-4275-1-ND; HEIGHT: 0.55mm; MANUFACTURER_NAME: Vishay; MANUFACTURER_PART_NUMBER: CRCW06030000Z0EAC; MFR: Samsung; MOUSER_PART_NUMBER: 71-CRCW06030000Z0EAC; MOUSER_PRICE-STOCK: https://www.mouser.com/Search/Refine.aspx?Keyword=71-CRCW06030000Z0EAC; MPN: RC1005F6653CS
R14 R15 = R-Panasonic-EXB_A10PXXXJ; MANUFACTURER_PART_NUMBER: EXBA10P391J; VENDOR: Panasonic
R19 = C3_SamacSys_Parts; DESCRIPTION: SMD 0603 thick film resistor 10R 1% Bourns CR0603-FX Series Thick Film Surface Mount Fixed Resistor 603 Case 10 +/-1% 0.1W +/-100ppm/C; HEIGHT: 0.55mm; MANUFACTURER_NAME: Bourns; MANUFACTURER_PART_NUMBER: CR0603-FX-10R0ELF; MOUSER_PART_NUMBER: 652-CR0603FX-10R0ELF; MOUSER_PRICE-STOCK: https://www.mouser.com/Search/Refine.aspx?Keyword=652-CR0603FX-10R0ELF; RS_PART_NUMBER: 7408818P; RS_PRICE-STOCK: http://uk.rs-online.com/web/p/products/7408818P
R20 R24 = C3_SamacSys_Parts; ALLIED_NUMBER: 70154687; ALLIED_PRICE-STOCK: https://www.alliedelec.com/bourns-cr0603-fx-1002elf/70154687/; DESCRIPTION: SMD 0603 thick film resistor 10K 1% Bourns CR0603-FX Series Thick Film Surface Mount Fixed Resistor 0603 Case 10k +/-1% 0.1W +/-100ppm/C; HEIGHT: 0.55mm; MANUFACTURER_NAME: Bourns; MANUFACTURER_PART_NUMBER: CR0603-FX-1002ELF; MOUSER_PART_NUMBER: 652-CR0603FX-1002ELF; MOUSER_PRICE-STOCK: https://www.mouser.com/Search/Refine.aspx?Keyword=652-CR0603FX-1002ELF; RS_PART_NUMBER: 7408805P; RS_PRICE-STOCK: http://uk.rs-online.com/web/p/products/7408805P
R28 R34 = C3_SamacSys_Parts; DESCRIPTION: BOURNS - CR0603-FX-1500ELF - RES, THICK FILM, 150R, 1%, 0.1W, 0603; HEIGHT: 0.55mm; MANUFACTURER_NAME: Bourns; MANUFACTURER_PART_NUMBER: CR0603-FX-1500ELF; MOUSER_PART_NUMBER: 652-CR0603FX-1500ELF; MOUSER_PRICE-STOCK: https://www.mouser.com/Search/Refine.aspx?Keyword=652-CR0603FX-1500ELF; RS_PART_NUMBER: 7408833; RS_PRICE-STOCK: https://uk.rs-online.com/web/p/products/7408833
R32 R33 R39 R40 = C3_SamacSys_Parts; DESCRIPTION: Thick Film Resistors - SMD; HEIGHT: 0.55mm; MANUFACTURER_NAME: Vishay; MANUFACTURER_PART_NUMBER: CRCW06030000Z0EAC; MOUSER_PART_NUMBER: 71-CRCW06030000Z0EAC; MOUSER_PRICE-STOCK: https://www.mouser.com/Search/Refine.aspx?Keyword=71-CRCW06030000Z0EAC
R36 = C3_SamacSys_Parts; DESCRIPTION: Thick Film Resistors - SMD 23.7K ohm 1%; DIS: Digi-Key; DPN: 1276-4275-1-ND; HEIGHT: 0.55mm; MANUFACTURER_NAME: Bourns; MANUFACTURER_PART_NUMBER: CR0603-FX-2372ELF; MFR: Samsung; MOUSER_PART_NUMBER: 652-CR0603FX-2372ELF; MOUSER_PRICE-STOCK: https://www.mouser.com/Search/Refine.aspx?Keyword=652-CR0603FX-2372ELF; MPN: RC1005F6653CS
TP1-TP8 TP10 TP11 TP13-TP20 TP22 TP23 = Tova
U1 = U-Maxim-MAX892LEUA+T-power-switch; MANUFACTURER_PART_NUMBER: MAX892LEUA+T; VENDOR: Maxim Integrated Products
U2 U3 = U-TI-TCAN330-CAN-transceiver; MFR: Texas Instruments; MPN: TCAN330GDCNT
U4 = U-TI-TPS2596XX-eFuse
U5 = U-TI-TPS6211x-SPS-buck; MFR: TI; MPN: TPS62111RSA
U6 = U-Maxim-MAX6374-watchdog; MANUFACTURER_PART_NUMBER: max6374kat; VENDOR: Maxim Integrated Products
U7 = U-ST-STM32F446RE-uC
U9 = U-C3-eMMC-153pin
U11 U13 = U-ON-Semi-AX5043-radio
U12 U14 = U-TI-LP2985XX-N-linear-reg
U$1 = oresat-cards
U$2 = TrueC3_FTDIlbr
X1 = low-gain-radio; DIS: Digi-Key; DPN: XC2181CT-ND; MFR: ECS Inc.; MPN: ECS-160-10-36Q-ES-TR
X3 X4 = X-Taitien-TY-TCXO

## Nets
1V1: C50.1 C51.1 C52.1 U12.5 X3.4
1V2: C66.1 C67.1 C68.1 U14.5 X4.4
3.3V: C2.2 C3.2 C6.2 C8.2 C9.2 C12.1 C13.2 C17.2 C22.2 D7.2 J7.1 L2.2 Q1.4 R2.2 R12.2 R13.1 R14.5 R14.10 R15.5 R15.10 R16.2 R27.2 R32.1 R33.2 R39.1 R40.2 TP17.1 U2.3 U3.3 U5.10 U7.1 U7.13 U7.19 U7.32 U7.48 U7.64
!CB_FLT: TP1.1 U4.6
!OPD_ENABLE: D4.C TP13.1 U1.3 U7.28
ANTN1: C42.2 L7.2 U11.4
ANTN2: C58.2 L11.2 U13.4
ANTP2 [RF1]: C43.2 L6.2 L8.1 U11.3
ANTP3 [RF1]: C49.2 L9.2 U11.5
ANTP4 [RF1]: C59.2 L10.2 L12.1 U13.3
ANTP5 [RF1]: C65.2 L13.2 U13.5
AUX-1: J1.1 J1.2 JP9.1
AUX-2: J1.3 J1.4 JP9.2
AUX-3: J1.5 J1.6 JP9.3
AUX-4: J1.7 J1.8 JP9.4
AUX-5: J1.9 J1.10 JP9.5
AUX-6: J1.11 J1.12 JP9.6
AUX-7: J1.13 J1.14 JP9.7
AUX-8: J1.15 J1.16 JP9.8
AUX-9: J1.17 J1.18 JP9.9
AUX_!SHUTDOWN: J1.19 J1.20 JP9.10
BOOT0: R17.2 TP15.1 U7.60
CAN1_H: J6.33 J6.34 U2.7
CAN1_L: J6.35 J6.36 U2.6
CAN1_RX: U2.4 U7.44
CAN1_SHDN: U2.5 U7.43
CAN1_SILENT: U2.8 U7.42
CAN1_TX: U2.1 U7.45
CAN2_H: J6.17 J6.18 U3.7
CAN2_L: J6.19 J6.20 U3.6
CAN2_RX: U3.4 U7.57
CAN2_SHDN: U3.5 U7.56
CAN2_SILENT: U3.8 U7.59
CAN2_TX: U3.1 U7.58
CB_IOUT: R6.2 R20.1 TP10.1 U4.7
CB_IOUT_IN: R20.2 U7.26
CLKN1: C44.1 R28.1 U11.27
CLKN2: C60.1 R34.1 U13.27
CLKP1: C45.1 R28.2 U11.28
CLKP2: C61.1 R34.2 U13.28
CRYSTALIN: C16.1 U7.5 X1.1
CRYSTALOUT: C11.1 U7.6 X1.3
CS1: J15.1 U11.14
CS2: J19.1 U13.14
EN/UVLO: R5.1 R9.2 U4.3
GND: C1.2 C2.1 C3.1 C4.2 C5.2 C6.1 C7.2 C8.1 C9.1 C10.2 C11.2 C12.2 C13.1 C14.2 C15.2 C16.2 C17.1 C18.2 C19.2 C21.2 C22.1 C23.2 C24.2 C25.2 C26.2 C43.1 C44.2 C46.2 C47.1 C50.2 C51.2 C52.2 C53.2 C54.2 C55.2 C56.2 C57.2 C59.1 C60.2 C62.2 C63.1 C66.2 C67.2 C68.2 C69.2 C70.2 C71.2 C72.2 C73.2 CM1.P$1 CM1.P$2 CM1.P$3 CM1.P$4 CM2.P$1 CM2.P$2 CM2.P$3 CM2.P$4 CM3.P$1 CM3.P$2 CM3.P$3 CM3.P$4 D1.C D2.C D3.C D5.C J2.1 J2.2 J3.1 J3.2 J4.1 J4.2 J6.27 J6.28 J6.29 J6.30 J6.31 J6.32 J6.37 J6.38 J7.3 J7.5 J7.9 J8.1 J8.2 J9.1 J9.2 J10.1 J10.2 J11.1 J11.2 J13.1 J13.2 J14.1 J14.2 J15.13 J15.14 J15.15 J15.16 J19.13 J19.14 J19.15 J19.16 L7.1 L8.2 L9.1 L11.1 L12.2 L13.1 R6.1 R9.1 R10.1 R17.1 R36.1 TP11.1 U1.4 U2.2 U3.2 U4.1 U4.THERMAL U5.1 U5.6 U5.7 U5.9 U5.11 U5.12 U5.16 U5.PAD U6.2 U6.5 U6.6 U7.12 U7.18 U7.31 U7.47 U7.63 U9.A6 U9.C4 U9.D4 U9.E7 U9.G5 U9.H10 U9.J5 U9.K8 U9.N1 U9.N2 U9.N5 U9.P4 U9.P6 U11.2 U11.6 U11.25 U11.26 U11.PAD U12.2 U13.2 U13.6 U13.25 U13.26 U13.PAD U14.2 U$2.P$6 X1.2 X1.4 X3.2 X4.2
IRQ1: J15.9 U11.19
IRQ2: J19.9 U13.19
MISO1: J15.5 U11.16
MISO2: J19.5 U13.16
MMC_PWR: Q1.3 R15.6 U7.2
MMC_VDD: C23.1 C24.1 C25.1 C26.1 Q1.1 Q1.2 Q1.5 Q1.6 U9.C6 U9.E6 U9.F5 U9.J10 U9.K9 U9.M4 U9.N4 U9.P3 U9.P5
MOSI1: J15.7 U11.17
MOSI2: J19.7 U13.17
N$1: D3.A R3.1
N$2: C64.1 J11.FEED
N$3: D7.1 R19.2
N$5: D4.A R27.1
N$7: U11.9 U11.10
N$8: C46.1 U11.1
N$9: C47.2 U11.7
N$10: C56.1 U12.4
N$11 [RF2]: C42.1 C48.2 L6.1
N$12 [RF2]: C45.2 X3.3
N$13: U13.9 U13.10
N$14: C62.1 U13.1
N$15: C63.2 U13.7
N$16: C72.1 U14.4
N$17 [RF2]: C58.1 C64.2 L10.1
N$18 [RF2]: C61.2 X4.3
N$270: D1.A R1.1
N$271: D2.A R2.1
N$300: CM3.RF J4.FEED
N$400: D5.A R4.1
N$406: JP8.2 U$2.P$4
NRST: J7.10 TP2.1 U7.7
OPD-3.3V: C5.1 R12.1 U1.1 U1.2
OPD_!FAULT: R16.1 TP8.1 U1.6 U7.55
OPD_ISET: R24.1 R36.2 TP14.1 U1.5
OPD_ISET_IN: R24.2 U7.27
OPD_PWR: C4.1 J6.15 J6.16 R4.2 R8.1 R11.1 U1.7 U1.8
OPD_SCL: J6.13 J6.14 R8.2 U7.61
OPD_SDA: J6.11 J6.12 R11.2 U7.62
OSC32_IN: U7.3
OSC32_OUT: U7.4
PA1: TP5.1 U7.15
PA15: TP6.1 U7.50
PB10: TP4.1 U7.29
PB12: U7.33
PC0: U7.8
PC1: U7.9
PC2: U7.10
PC3: U7.11
PC4: U7.24
PC5: U7.25
PWRAMP1: J15.11 U11.20
PWRAMP2: J19.11 U13.20
RADIO1_CS: J15.2 U7.37
RADIO1_IRQ: J15.10 U7.20
RADIO1_PTT: J15.12
RADIO2_CS: J19.2 U7.38
RADIO2_IRQ: J19.10 U7.41
RADIO2_PTT: J19.12
RF1: CM1.RF J2.FEED
RF2: CM2.RF J3.FEED
RX1 [RF1]: C48.1 J10.FEED
SCLK1: J15.3 U11.15
SCLK2: J19.3 U13.15
SD: J6.39 J6.40 R13.2 U6.7
SDIO_CK: R14.2 TP7.1 U7.53 U9.M6
SDIO_CMD: R14.9 U7.54 U9.M5
SDIO_D0: R15.1 U7.39 U9.A3
SDIO_D1: R15.9 U7.40 U9.A4
SDIO_D2: R15.2 U7.51 U9.A5
SDIO_D3: R14.7 U7.52 U9.A1 U9.B2
SDIO_D4: R14.6 U9.A2 U9.B3
SDIO_D5: R14.8 U9.B4 U9.C3 U9.D3
SDIO_D6: R14.4 U9.B5 U9.C5
SDIO_D7: R15.3 U9.B6 U9.C7
SDIO_RST: R14.3 U9.K5
SPI1_MISO: J15.6 J19.6 TP22.1 U7.22
SPI1_MOSI: J15.8 J19.8 TP18.1 U7.23
SPI1_SCK: J15.4 J19.4 TP23.1 U7.21
SPI2_MISO: U7.35
SPI2_MOSI: U7.36
SPI2_SCK: U7.34
SWCLK: J7.4 U7.49
SWDIO: J7.2 U7.46
SYSCLK1 [RF1]: J8.FEED U11.13
SYSCLK2 [RF1]: J14.FEED U13.13
TPS62111-PG: TP16.1 U5.13
TPS62111-SYNC: R7.1 R10.2 TP19.1 U5.5
TPS62111_SW: L2.1 U5.14 U5.15
TX1 [RF1]: C49.1 J9.FEED
TX2 [RF1]: C65.1 J13.FEED
USART2_RX: U7.17 U$2.P$3
USART2_TX: U7.16 U$2.P$2
VBUS: C1.1 J6.21 J6.22 J6.23 J6.24 J6.25 J6.26 R5.2 U4.4
VBUSP: C7.1 C10.1 JP8.1 R1.2 R7.2 TP20.1 U4.5 U5.2 U5.3 U5.4 U5.8
VCAP: C14.1 U7.30
VDD_IO-1: C53.1 C54.1 C55.1 R33.1 U11.23
VDD_IO-2: C69.1 C70.1 C71.1 R40.1 U13.23
VDDI: C19.1 C21.1 U9.C1 U9.C2
VIN-1V8-1: C57.1 R32.2 U12.1 U12.3
VIN-1V8-2: C73.1 R39.2 U14.1 U14.3
WDT: R3.2 TP3.1 U6.1 U7.14
WDT-PWR: C15.1 C18.1 R19.1 U6.4 U6.8